# Altium PCB PCB.PcbDoc
Units mm, origin at the board's own origin, x right, y up, seen from the top; angles counter-clockwise.
Board outline 24.13 x 47.62 mm, 2 copper layers (Top Layer, Bottom Layer); 5 components, 23 nets, 76 pads, 0 vias.
Unrouted connection lines stored in the file: 7.
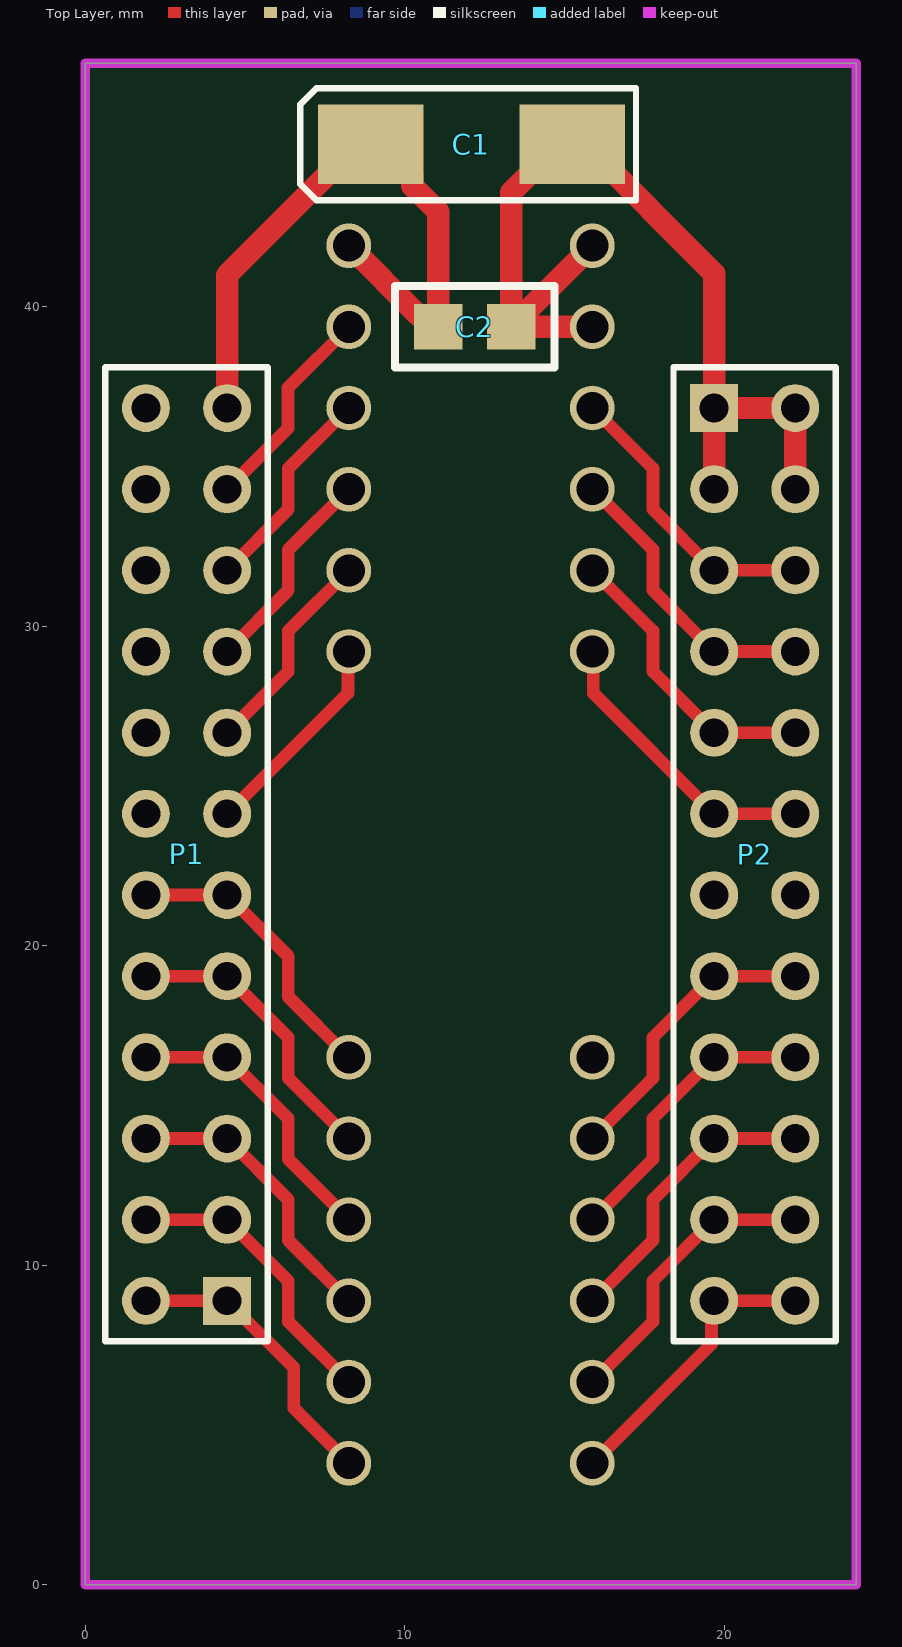
[diagram p0: Top Layer view]
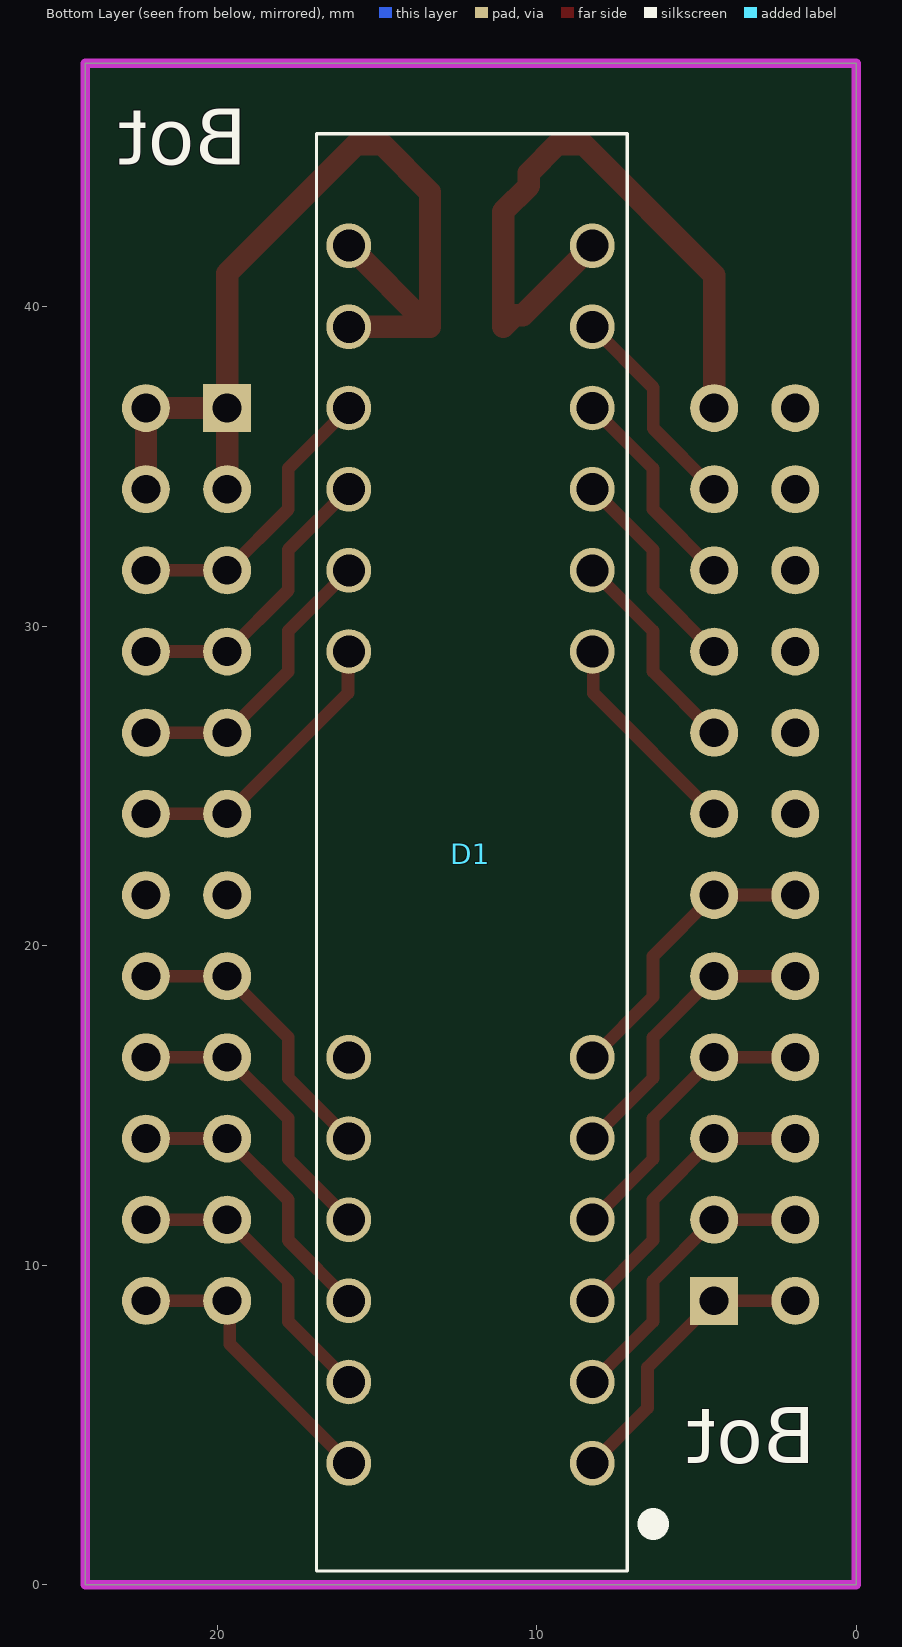
[diagram p1: Bottom Layer view, seen from below]

## Layer stack, top to bottom
Top Solder: solder mask 0.0102, Solder Resist, Dk 3.5
Top Layer: signal copper 0.0356
Dielectric 1: dielectric 0.32, FR-4, Dk 4.8
Bottom Layer: signal copper 0.0356
Bottom Solder: solder mask 0.0102, Solder Resist, Dk 3.5

## Board outline
0,0 0,47.625 24.13,47.625 24.13,0

## Design rules (kind name [scope] priority, off if disabled: settings)
Clearance [All] p1: gap=0.254 ignorepadtopadclearanceinfootprint=FALSE except(0: Arc-Hole Track-Hole SMDPad-Hole THPad-Hole Via-Hole Fill-Hole Poly-Hole Region-Hole Text-Hole)
PolygonConnect [All] p1: connectstyle=Relief reliefconductorwidth=0.254 reliefentries=4 polygonreliefangle="90 Angle" airgapwidth=0.254
RoutingVias [All] p1: holewidth=0.711 width=1.27 viastyle="Through Hole" minholewidth=0.711 minwidth=1.27 maxholewidth=0.711 maxwidth=1.27
SolderMaskExpansion [All] p1: expansion=0.102
Width [All] p1: maxlimit=2 minlimit=0.254 preferedwidth=0.3
30 further rules are at their usual default settings.

## Components (designator, comment, footprint, x,y, rotation, side; value= is the part's Value field where it differs from the comment)
C1 "CAP_TANT" TYPE_C 15.24,45.085 r180 top
C2 "0,1" CAP_SMALL 9.685,38.1 r0 top
D1 "HDSP2131" HDSP2131 15.875,3.81 r180 bottom
P1 "Header 12X2" HDR2X12 4.445,8.89 r90 top
P2 "Header 12X2" HDR2X12 19.685,36.83 r270 top

## Footprints (in the part's own frame and the unit in brackets; to place one, negate y for a bottom-side part, rotate by r counter-clockwise, add the part's x,y. Pads: shape width x height; smd on the part's side, far side on the other; paste and mask are expansions set on the pad)
CAP_SMALL [mil] "FROM_MAX"
  rect 60x55.98 smd: 1(53.71,50) 2(143.71,50)
  silkscreen extent 1,0 197,100, body extent 20,18 178,82, height 100
HDR2X12 [mm] "Connector; Header; 12x2 Position"
  rect 1.5x1.5 hole 0.9: 1(0,0)
  round 1.5 hole 0.9: 2(0,2.54) 3(2.54,0) 4(2.54,2.54) 5(5.08,0) 6(5.08,2.54) 7(7.62,0) 8(7.62,2.54) 9(10.16,0) 10(10.16,2.54) 11(12.7,0) 12(12.7,2.54) 13(15.24,0) 14(15.24,2.54) 15(17.78,0) 16(17.78,2.54) 17(20.32,0) 18(20.32,2.54) 19(22.86,0) 20(22.86,2.54) 21(25.4,0) 22(25.4,2.54) 23(27.94,0) 24(27.94,2.54)
  silkscreen extent -1.27,-1.27 29.21,3.81
HDSP2131 [mm]
  round 1.4 hole 1 unplated: 1(7.62,0) 2(7.62,2.54) 3(7.62,5.08) 4(7.62,7.62) 5(7.62,10.16) 6(7.62,12.7) 7(7.62,25.4) 8(7.62,27.94) 9(7.62,30.48) 10(7.62,33.02) 11(7.62,35.56) 12(7.62,38.1) 13(0,38.1) 14(0,35.56) 15(0,33.02) 16(0,30.48) 17(0,27.94) 18(0,25.4) 19(0,12.7) 20(0,10.16) 21(0,7.62) 22(0,5.08) 23(0,2.54) 24(0,0)
  silkscreen extent -1.02,-3.38 8.71,41.61
TYPE_C [mm]
  rect 3.3x2.5 smd: 1(0,0) 2(6.3,0)
  silkscreen extent -2,-1.75 8.5,1.75

## Part data
C1: "SMD"
C2: library part CAP_SMALL, "0805"
P1 P2: "Header, 12-Pin, Dual row", LatestRevisionDate=17-Jul-2002, LatestRevisionNote="Re-released for DXP Platform.", Publisher="Altium Limited"

## Nets (pads, with @x,y where several pads share a name; then routed paths per layer and width w, separated by ;. In a path a pad name is that pad's centre, name@x,y a point inside that pad or via, vN(x,y) a via of type N, cw(c..) or ccw(c..) an arc to the next point about the centre after c; other vN are vias at no path point)
1: D1.1 P1.1 P1.2 | length 9.2
  Top Layer w0.4: P1.2 P1.1 6.529,6.806 6.529,5.536 D1.1
2: D1.2 P1.3 P1.4 | length 9.2
  Top Layer w0.4: P1.4 P1.3 6.36,9.515 6.36,8.245 D1.2
3: D1.3 P1.5 P1.6 | length 9.2
  Top Layer w0.4: P1.6 P1.5 6.36,12.055 6.36,10.785 D1.3
4: D1.4 P1.7 P1.8 | length 9.2
  Top Layer w0.4: P1.8 P1.7 6.36,14.595 6.36,13.325 D1.4
5: D1.5 P1.9 P1.10 | length 9.2
  Top Layer w0.4: P1.10 P1.9 6.36,17.135 6.36,15.865 D1.5
6: D1.6 P1.11 P1.12 | length 9.2
  Top Layer w0.4: P1.12 P1.11 6.36,19.675 6.36,18.405 D1.6
7: D1.7 P1.13 P1.14 | length 6.7
  Top Layer w0.4: P1.13 8.225,27.91 8.225,29.18 D1.7
8: D1.8 P1.15 P1.16 | length 6.7
  Top Layer w0.4: P1.15 6.36,28.585 6.36,29.855 D1.8
9: D1.9 P1.17 P1.18 | length 6.7
  Top Layer w0.4: P1.17 6.36,31.125 6.36,32.395 D1.9
10: D1.10 P1.19 P1.20 | length 6.7
  Top Layer w0.4: P1.19 6.36,33.665 6.36,34.935 D1.10
11: D1.11 P1.21 P1.22 | length 6.7
  Top Layer w0.4: P1.21 6.35,36.195 6.35,37.465 D1.11
12: C1.2 C2.1 D1.12 P1.23 P1.24 | length 21
  Top Layer w0.7: P1.23 4.445,40.99 8.54,45.085 C1.2 9.34,45.085 10.24,44.185 10.24,43.785 11.049,42.976 C2.1 10.688,39.731 10.434,39.731 D1.12
15: D1.15 P2.5 P2.6 | length 9.2
  Top Layer w0.4: D1.15 17.77,34.935 17.77,33.665 P2.5 P2.6
16: D1.16 P2.7 P2.8 | length 9.2
  Top Layer w0.4: D1.16 17.77,32.395 17.77,31.125 P2.7 P2.8
17: D1.17 P2.9 P2.10 | length 9.2
  Top Layer w0.4: D1.17 17.77,29.855 17.77,28.585 P2.9 P2.10
18: D1.18 P2.11 P2.12 | length 9.2
  Top Layer w0.4: D1.18 15.905,29.18 15.905,27.91 P2.11 P2.12
19: P2.13 P2.14
20: D1.20 P2.15 P2.16 | length 9.2
  Top Layer w0.4: D1.20 17.77,15.865 17.77,17.135 P2.15 P2.16
21: D1.21 P2.17 P2.18 | length 9.2
  Top Layer w0.4: D1.21 17.77,13.325 17.77,14.595 P2.17 P2.18
22: D1.22 P2.19 P2.20 | length 9.2
  Top Layer w0.4: D1.22 17.77,10.785 17.77,12.055 P2.19 P2.20
23: D1.23 P2.21 P2.22 | length 9.2
  Top Layer w0.4: D1.23 17.77,8.245 17.77,9.515 P2.21 P2.22
24: D1.24 P2.23 P2.24 | length 9.2
  Top Layer w0.4: D1.24 19.605,7.54 19.605,8.81 P2.23 P2.24
GND: C1.1 C2.2 D1.13 D1.14 P2.1 P2.2 P2.3 P2.4 | length 30.8
  Top Layer w0.7: D1.14 C2.2 ; D1.13 C2.2 ; P2.3 P2.1 ; P2.4 P2.2 P2.1 ; C2.2 13.335,43.58 14.84,45.085 C1.1 15.64,45.085 19.685,41.04 P2.1
pads on no net: D1.19

## Keep-outs
Keep-Out Layer:
  the board outline again, w0.3

## Silkscreen, mask and mechanical layers (free items; w line width, h text height)
Bottom Overlay:
  lines w1: 6.35,1.905 6.35,1.905
  text "Bot" at 19.05,44.45 h1.75
  text "Bot" at 1.27,3.81 h1.75